# EAGLE board mux-break (EAGLE 6.5.0)
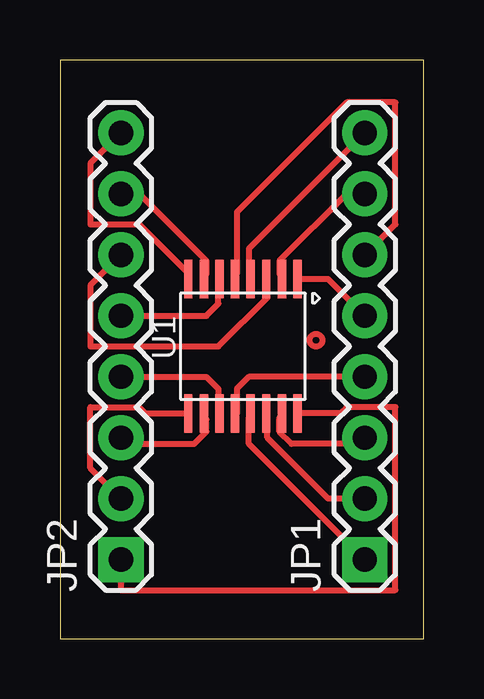
[diagram p0: board, top side]

Size 15.16 x 24.12 mm. Coordinates in mm from the lower left corner, seen from the top.
Outline: 0,0 15.16,0 15.16,24.12 0,24.12 0,0
Copper layers (1*16): Top 0.035mm / dielectric 1.5mm / Bottom 0.035mm
Design rules "default": minimum track width 10mil, minimum drill 24mil, track to track 8mil, track to pad 8mil, pad to pad 8mil, via to via 8mil, smd to smd 8mil, copper to edge 40mil, drill to drill 8mil, minimum pad ring 10mil, minimum via ring 8mil, stop-mask expansion 4mil, vias tented up to drill 0mil, thermal gap 10mil

## Footprints (pad centres in the part's own frame; a part is rotated, then mirrored left to right if it is on the bottom)
1X08 = drill 1.016 pad 1.88 square: 1 0,0 | drill 1.016 pad 1.88: 2 2.54,0; 3 5.08,0; 4 7.62,0; 5 10.16,0; 6 12.7,0; 7 15.24,0; 8 17.78,0
TSSOP-16 = smd 1.6 x 0.35: P$1 -2.8,2.275; P$2 -2.8,1.625; P$3 -2.8,0.975; P$4 -2.8,0.325; P$5 -2.8,-0.325; P$6 -2.8,-0.975; P$7 -2.8,-1.625; P$8 -2.8,-2.275; P$9 2.8,-2.275; P$10 2.8,-1.625; P$11 2.8,-0.975; P$12 2.8,-0.325; P$13 2.8,0.325; P$14 2.8,0.975; P$15 2.8,1.625; P$16 2.8,2.275

## Placement (x,y rotation side)
JP1  [1X08]  12.7,3.3 90 top
JP2  [1X08]  2.54,3.3 90 top
U1  CD4051BPWR  [TSSOP-16]  7.62,12.19 270 top

## Library data of the parts
JP1 JP2 = SparkFun-Connectors; PROD_ID: CONN-08438
U1 = butter

## Nets
N$1: JP1.1 U1.P$13
N$2: JP1.2 U1.P$14
N$3: JP1.3 U1.P$15
N$4: JP1.4 U1.P$12
N$5: JP1.5 U1.P$1
N$6: JP1.6 U1.P$5
N$7: JP1.7 U1.P$2
N$8: JP1.8 U1.P$4
N$9: JP2.8 U1.P$8
N$10: JP2.2 U1.P$9
N$11: JP2.3 U1.P$10
N$12: JP2.4 U1.P$11
N$13: JP2.5 U1.P$6
N$14: JP2.6 U1.P$3
N$15: JP2.7 U1.P$7
N$16: JP2.1 U1.P$16

## Tracks (layer width: path | path; a pad name or v marks a point on that pad's centre or on a via)
N$1
  Top 0.254: JP1.1 7.87,8.13 7.87,9.14 U1.P$13
N$2
  Top 0.254: JP1.2 11.18,5.84 8.64,8.38 8.64,9.14 U1.P$14
N$3
  Top 0.254: JP1.3 12.7,8.13 9.65,8.13 9.14,8.64 9.14,9.14 U1.P$15
N$4
  Top 0.254: JP1.4 7.87,10.92 7.37,10.41 7.37,9.4 U1.P$12
N$5
  Top 0.254: JP1.5 11.68,14.48 11.18,14.99 U1.P$1
N$6
  Top 0.254: JP1.6 13.97,17.27 13.97,22.35 11.94,22.35 7.37,17.78 7.37,15.24 U1.P$5
N$7
  Top 0.254: JP1.7 11.94,18.54 9.14,15.75 9.14,15.24 U1.P$2
N$8
  Top 0.254: JP1.8 7.87,16.26 7.87,15.24 U1.P$4
N$9
  Top 0.254: JP2.8 1.27,19.81 1.27,17.27 3.3,17.27 5.33,15.24 U1.P$8
N$10
  Top 0.254: JP2.2 1.27,7.11 1.27,9.65 3.3,9.65 3.56,9.4 5.33,9.4 U1.P$9
N$11
  Top 0.254: JP2.3 2.54,8.13 5.59,8.13 6.1,8.64 6.1,9.14 U1.P$10
N$12
  Top 0.254: JP2.4 6.1,10.92 6.6,10.41 6.6,9.4 U1.P$11
N$13
  Top 0.254: JP2.5 6.1,13.46 6.6,13.97 6.6,14.99 U1.P$6
N$14
  Top 0.254: JP2.6 1.27,14.73 1.27,12.19 6.6,12.19 8.64,14.22 8.64,14.99 U1.P$3
N$15
  Top 0.254: JP2.7 3.3,18.54 6.1,15.75 6.1,15.24 U1.P$7
N$16
  Top 0.254: JP2.1 2.54,2.03 13.97,2.03 13.97,9.65 11.94,9.65 11.68,9.4 U1.P$16
(copper drawn outside any net)
  shapes: Top circle x1